# Altium PCB solid_state_overdrive_v2.PcbDoc
Units mm, origin at the board's own origin, x right, y up, seen from the top; angles counter-clockwise.
Board outline 106.68 x 50.55 mm, 2 copper layers (Top Layer, Bottom Layer); 51 components, 28 nets, 118 pads, 0 vias.
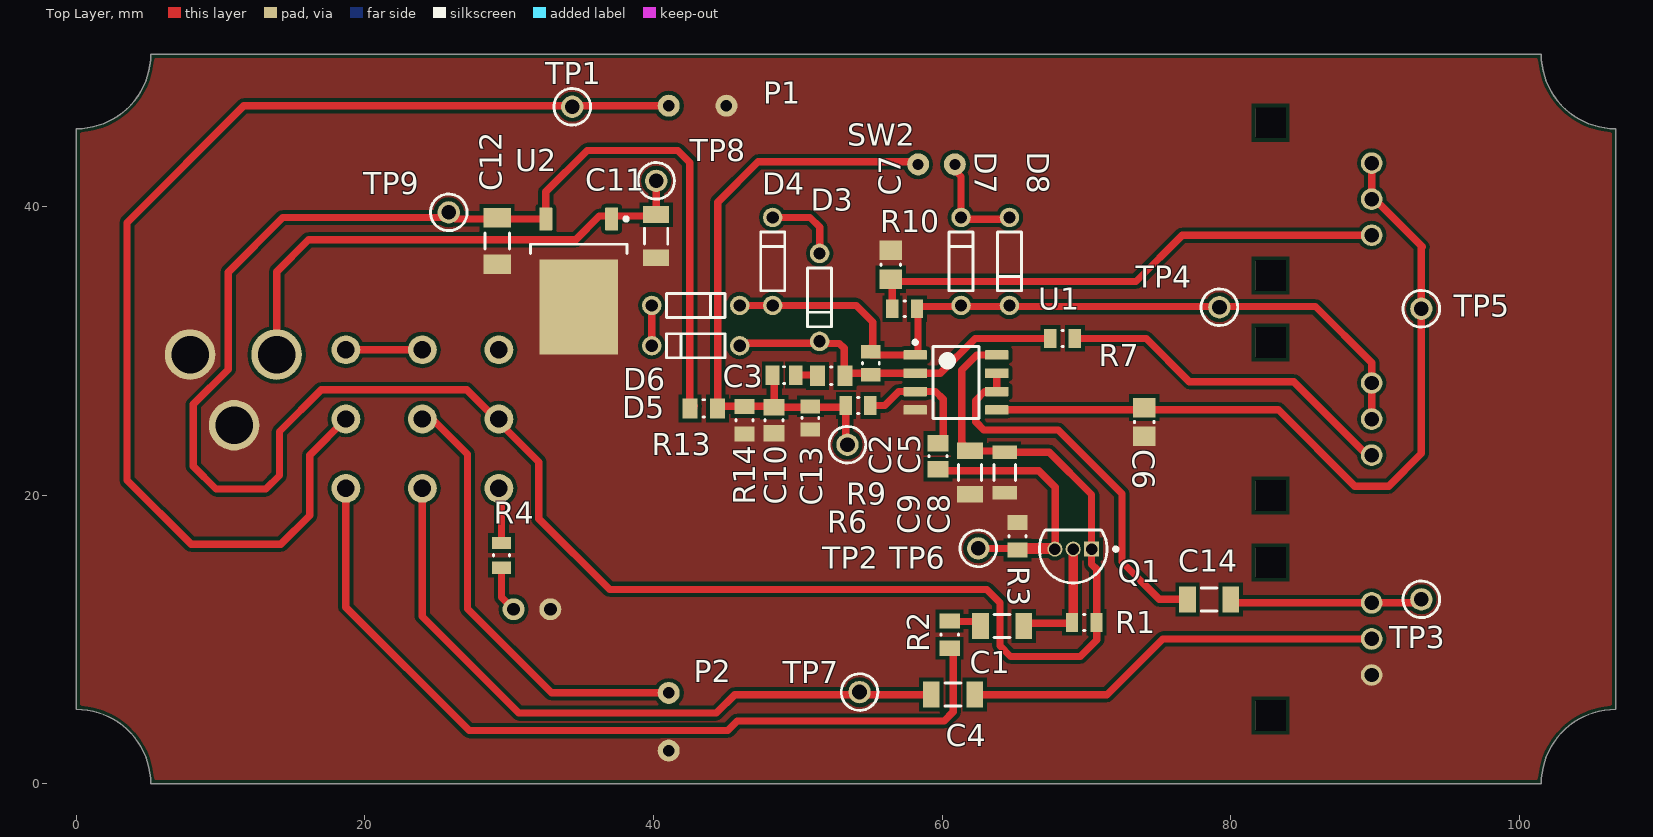
[diagram p0: Top Layer view]
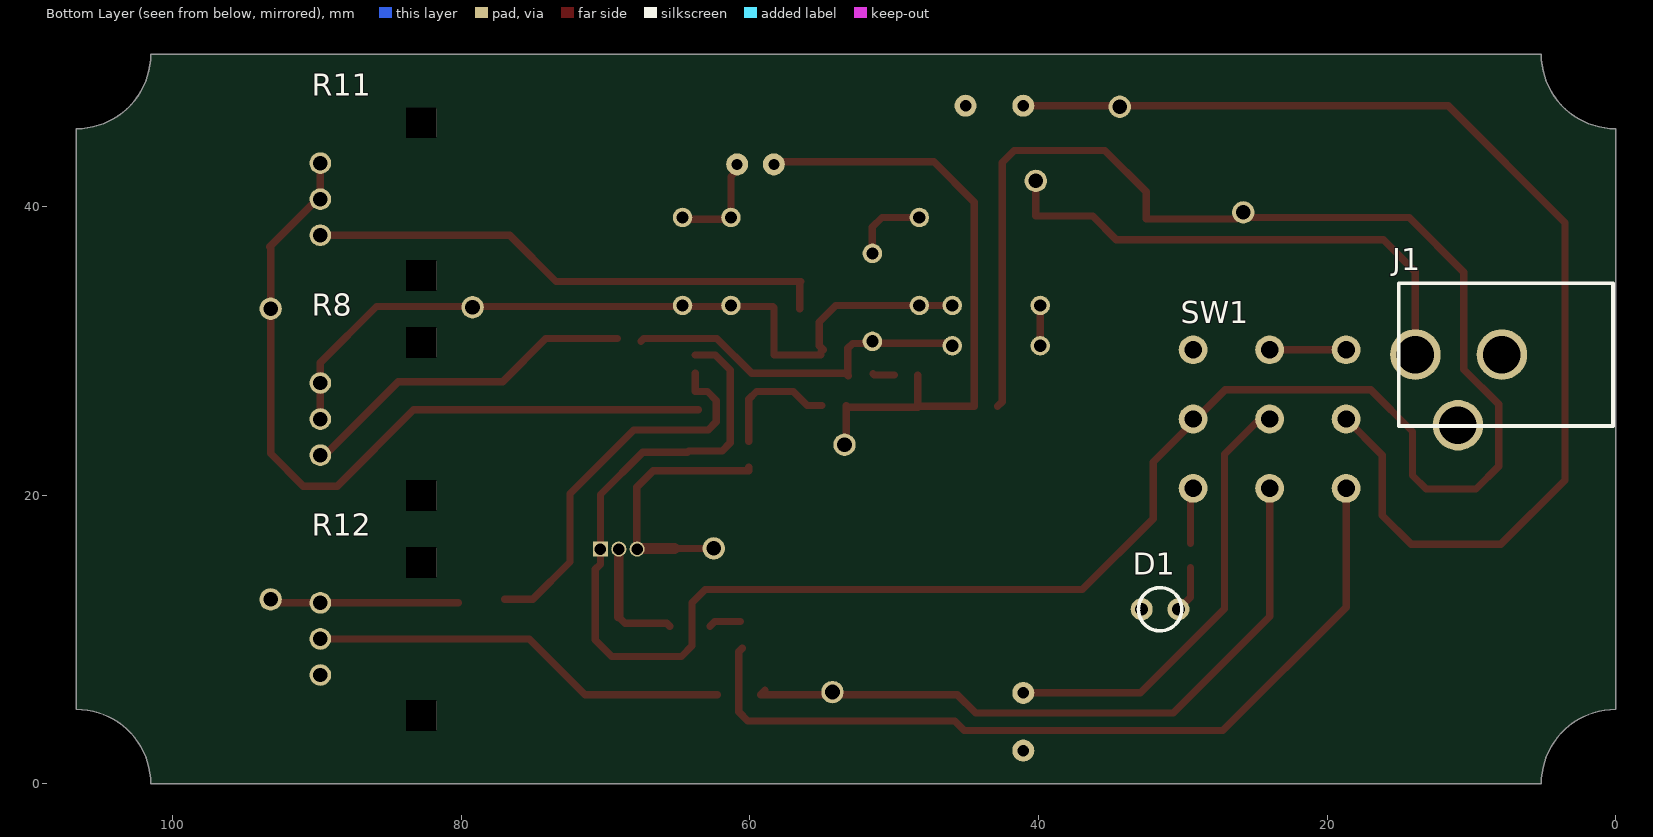
[diagram p1: Bottom Layer view, seen from below]

## Layer stack, top to bottom
Top Solder: solder mask 0.0102, Solder Resist, Dk 3.5
Top Layer: signal copper 0.0356
Dielectric 1: dielectric 0.32, FR-4, Dk 4.8
Bottom Layer: signal copper 0.0356
Bottom Solder: solder mask 0.0102, Solder Resist, Dk 3.5

## Board outline
5.15,0 ccw(c0,0) 0,5.15 0,45.396 ccw(c0,50.546) 5.15,50.546 101.53,50.546 ccw(c106.68,50.546) 106.68,45.396 106.68,5.15 ccw(c106.68,0) 101.53,0

## Design rules (kind name [scope] priority, off if disabled: settings)
BoardOutlineClearance [All] p1: gap=0.254
Clearance [All] p1: gap=0.381 except(0.254: Arc-Poly Track-Poly SMDPad-Poly THPad-Poly Via-Poly Fill-Poly)
PolygonConnect [All] p1: connectstyle=Direct reliefconductorwidth=0.254 reliefentries=4 polygonreliefangle="90 Angle" airgapwidth=0.254
RoutingVias [All] p1: holewidth=0.711 width=1.27 viastyle="Through Hole" minholewidth=0.711 minwidth=1.27 maxholewidth=0.711 maxwidth=1.27
SolderMaskExpansion [All] p1: expansion=0.102
Width [All] p1: maxlimit=1.27 minlimit=0.254 preferedwidth=0.508 bottomlayer_maxwidth=0.254 bottomlayer_prefwidth=0.254 minimp=50.000000 maximp=50.000000 favimp=50.000000
30 further rules are at their usual default settings.

## Components (designator, comment, footprint, x,y, rotation, side; value= is the part's Value field where it differs from the comment)
C1 "CAP 10nF 25V 1206(3216)" CAPC1206(3216)170_N 64.16,10.922 r0 top
C2 "CAP 10nF 25V 0805(2012)" CAPC0805(2012)75_L 55.067,29.134 r90 top
C3 "CAP 1uF 50V 0805(2012)" CAPC0805(2012)145_L 49.047,28.321 r180 top
C4 "CAP 10nF 25V 1206(3216)" CAPC1206(3216)170_N 60.757,6.172 r180 top
C5 "CAP 100nF 50V 0805(2012)" CAPC0805(2012)145_N 59.715,22.708 r90 top
C6 "CAP 1nF 50V 0805(2012)" CAPC0805(2012)75_M 74.016,25.07 r270 top
C7 "CAP 1nF 50V 0805(2012)" CAPC0805(2012)75_M 56.439,35.966 r90 top
C8 "CAP 100nF 25V 1206(3216)" CAPC1206(3216)190_L 64.338,21.565 r90 top
C9 "CAP 4.7nF 25V 1206(3216)" CAPC1206(3216)100_N 61.925,21.565 r90 top
C10 "CAP 100nF 50V 0805(2012)" CAPC0805(2012)145_N 48.362,25.197 r90 top
C11 "CAP 330nF 16V 1206(3216)" CAPC1206(3216)110_N 40.183,37.948 r90 top
C12 "CAP 22uF 16V 1206(3216)" CAPC1206(3216)190_M 29.159,37.617 r90 top
C13 "CAP 4.7nF 50V 0805(2012)" CAPC0805(2012)110_L 50.876,25.349 r90 top
C14 "CAP 10nF 25V 1206(3216)" CAPC1206(3216)170_N 78.511,12.776 r0 top
D1 "5mm_LED" 3mm_diode 30.302,12.09 r0 bottom
D3 "JANTX1N4148-1" MCSM-DO-35-2 51.511,33.706 r270 top
D4 "JANTX1N4148-1" MCSM-DO-35-2 48.26,36.195 r90 top
D5 "JANTX1N4148-1" MCSM-DO-35-2 42.926,30.353 r180 top
D6 "JANTX1N4148-1" MCSM-DO-35-2 42.926,33.147 r0 top
D7 "JANTX1N4148-1" MCSM-DO-35-2 61.316,36.195 r90 top
D8 "JANTX1N4148-1" MCSM-DO-35-2 64.668,36.195 r270 top
J1 "DC JACK, 2.1mm ID" 163-179PH-EX 0.174,29.743 r0 bottom
P1 "JACK_MONO_6.35mm" MONO_JUMPER 43.053,46.99 r0 top
P2 "JACK_MONO_6.35mm" MONO_JUMPER 41.053,4.293 r270 top
Q1 "BC547B" ONSC-TO-92-3-29-11 69.088,16.256 r180 top
R1 "100K 5% 0805(2012)" RESC0805(2012)_L 69.85,11.176 r0 top
R2 "1K 5% 0805(2012)" RESC0805(2012)_N 60.528,10.338 r270 top
R3 "1K 5% 0805(2012)" RESC0805(2012)_N 65.227,17.145 r270 top
R4 "510R 5% 0805(2012)" RESC0805(2012)_L 29.464,15.824 r270 top
R6 "1K 5% 0805(2012)" RESC0805(2012)_N 52.324,28.271 r180 top
R7 "10K 5% 0805(2012)" RESC0805(2012)_L 68.351,30.861 r180 top
R8 "ALPHA-POT" ALPHA_POT 89.774,25.273 r270 bottom
R9 "100K 5% 0805(2012)" RESC0805(2012)_L 54.178,26.213 r180 top
R10 "510R 5% 0805(2012)" RESC0805(2012)_L 57.404,32.918 r0 top
R11 "ALPHA-POT" ALPHA_POT 89.774,40.513 r270 bottom
R12 "ALPHA-POT" ALPHA_POT 89.774,10.033 r270 bottom
R13 "1K 5% 0805(2012)" RESC0805(2012)_N 43.485,26.01 r0 top
R14 "1K 5% 0805(2012)" RESC0805(2012)_N 46.304,25.197 r270 top
SW1 "3PDT SW" 3PDT 23.978,25.273 r180 bottom
SW2 "SPST Toggle Switch" TOGGLE_SW_JUMPER 59.614,42.926 r0 top
TP1 "5001" KSTN-5001 34.366,46.914 r0 top
TP2 "5001" KSTN-5001 53.442,23.495 r0 top
TP3 "5001" KSTN-5001 93.218,12.776 r0 top
TP4 "5001" KSTN-5001 79.223,33.02 r0 top
TP5 "5001" KSTN-5001 93.218,32.918 r0 top
TP6 "5001" KSTN-5001 62.509,16.307 r0 top
TP7 "5001" KSTN-5001 54.28,6.35 r0 top
TP8 "5001" KSTN-5001 40.183,41.783 r0 top
TP9 "5001" KSTN-5001 25.806,39.599 r0 top
U1 "TL072ACD" D0008A_M 60.96,27.813 r0 top
U2 "BA90BC0FP" BA90BC0FP-E2 34.817,34.841 r270 top

## Footprints (in the part's own frame and the unit in brackets; to place one, negate y for a bottom-side part, rotate by r counter-clockwise, add the part's x,y. Pads: shape width x height; smd on the part's side, far side on the other; paste and mask are expansions set on the pad)
3mm_diode [mil]
  round 60 hole 35.43: 1(0,0) 2(100,0)
  silkscreen extent -9,-59 109,59
3PDT [mm] "FS57003PLT2B2M1QEH"
  round 2 hole 1.2: 1(-5.3,-4.8) 2(-5.3,0) 3(-5.3,4.8) 4(0,-4.8) 5(0,0) 6(0,4.8) 7(5.3,-4.8) 8(5.3,0) 9(5.3,4.8)
163-179PH-EX [mm] "2.1mm ID barrel jack"
  round 3.5 hole 2.6: 1(13.7,0) 2(10.75,4.9) 3(7.7,0)
  silkscreen extent 0,-4.95 14.86,4.95
ALPHA_POT [mm]
  round 1.5 hole 1: 1(-2.5,0) 2(0,0) 3(2.5,0)
  rect 2x2.1 hole 2.1 square: 4(-5.3,7) 4(5.3,7)
BA90BC0FP-E2 [mm] "D-PAK, 4-Leads, Body 6.1x6.6mm, Pitch 2.29mm, Lead Span 9.7mm, IPC High Density"
  rrect11% 1.6x0.9 smd: 1(-4.3,2.28) 3(-4.3,-2.28)
  rrect2% 6.6x5.45 smd: 4(1.8,0)
  silkscreen extent -4.42,-3.35 -1.9,3.4, body extent -2.55,-3.35 3.65,3.35, height 2.38
CAPC0805(2012)75_L [mm] "Chip Capacitor, Body 2.0x1.2mm, Height 0.75mm, IPC High Density"
  rect 0.95x1.35 smd: 1(-0.8,0) 2(0.8,0)
  silkscreen extent -0.05,-0.58 0.05,0.58, body extent -1.1,-0.72 1.1,0.72, height 0.75
CAPC0805(2012)75_M [mm] "Chip Capacitor, Body 2.0x1.2mm, Height 0.75mm, IPC Low Density"
  rect 1.35x1.55 smd: 1(-1,0) 2(1,0)
  silkscreen extent -0.05,-0.67 0.05,0.67, body extent -1.1,-0.72 1.1,0.72, height 0.75
CAPC0805(2012)110_L [mm] "Chip Capacitor, Body 2.0x1.2mm, Height 1.1mm, IPC High Density"
  rect 0.95x1.35 smd: 1(-0.8,0) 2(0.8,0)
  silkscreen extent -0.05,-0.58 0.05,0.58, body extent -1.1,-0.72 1.1,0.72, height 1.1
CAPC0805(2012)145_L [mm] "Chip Capacitor, Body 2.0x1.2mm, Height 1.45mm, IPC High Density"
  rect 0.95x1.35 smd: 1(-0.8,0) 2(0.8,0)
  silkscreen extent -0.05,-0.58 0.05,0.58, body extent -1.1,-0.72 1.1,0.72, height 1.45
CAPC0805(2012)145_N [mm] "Chip Capacitor, Body 2.0x1.2mm, Height 1.45mm, IPC Medium Density"
  rect 1.15x1.45 smd: 1(-0.9,0) 2(0.9,0)
  silkscreen extent -0.05,-0.62 0.05,0.63, body extent -1.1,-0.72 1.1,0.73, height 1.45
CAPC1206(3216)100_N [mm] "Chip Capacitor, Body 3.2x1.6mm, Height 1mm, IPC Medium Density"
  rect 1.15x1.8 smd: 1(-1.5,0) 2(1.5,0)
  silkscreen extent -0.55,-0.8 0.55,0.8, body extent -1.7,-0.9 1.7,0.9, height 1
CAPC1206(3216)110_N [mm] "Chip Capacitor, Body 3.2x1.6mm, Height 1.1mm, IPC Medium Density"
  rect 1.15x1.8 smd: 1(-1.5,0) 2(1.5,0)
  silkscreen extent -0.55,-0.8 0.55,0.8, body extent -1.7,-0.9 1.7,0.9, height 1.1
CAPC1206(3216)170_N [mm] "Chip Capacitor, Body 3.2x1.6mm, Height 1.7mm, IPC Medium Density"
  rect 1.15x1.8 smd: 1(-1.5,0) 2(1.5,0)
  silkscreen extent -0.55,-0.8 0.55,0.8, body extent -1.7,-0.9 1.7,0.9, height 1.7
CAPC1206(3216)190_L [mm] "Chip Capacitor, Body 3.2x1.6mm, Height 1.9mm, IPC High Density"
  rect 0.95x1.7 smd: 1(-1.4,0) 2(1.4,0)
  silkscreen extent -0.55,-0.75 0.55,0.75, body extent -1.7,-0.9 1.7,0.9, height 1.9
CAPC1206(3216)190_M [mm] "Chip Capacitor, Body 3.2x1.6mm, Height 1.9mm, IPC Low Density"
  rect 1.35x1.9 smd: 1(-1.6,0) 2(1.6,0)
  silkscreen extent -0.55,-0.85 0.55,0.85, body extent -1.7,-0.9 1.7,0.9, height 1.9
D0008A_M [mm] "SOIC, 8-Leads, Body 5x4mm, Pitch 1.27mm, IPC Low Density"
  rrect15% 1.65x0.65 smd: 1(-2.825,1.905) 2(-2.825,0.635) 3(-2.825,-0.635) 4(-2.825,-1.905) 5(2.825,-1.905) 6(2.825,-0.635) 7(2.825,0.635) 8(2.825,1.905)
  silkscreen extent -2.95,-2.5 1.6,2.9, body extent -3,-2.45 3,2.45, height 1.63
KSTN-5001 [mm] "Test Point, Through Hole, Dia 2.54mm"
  round 1.55 hole 1.016: 1(0,0)
  silkscreen extent -1.27,-1.27 1.27,1.27, body extent -1.25,-1.25 1.25,1.25, height 4.62
MCSM-DO-35-2 [mm] "TH, 2-Leads, Dia 1.665mm, Body 4.065x1.665mm"
  round 1.35 hole 0.85: 1(-3.049,0) 2(3.049,0)
  silkscreen extent -2.03,-0.83 2.03,0.83, body extent -3.33,-0.83 3.33,0.83, height 1.67
MONO_JUMPER [mm]
  round 1.524 hole 0.8: 1(-2,0) 2(2,0)
ONSC-TO-92-3-29-11 [mm] "TO, 3-Leads, Body Dia 4.7mm, Pitch 1.27mm"
  rect 1.05x1.05 hole 0.8: 1(-1.27,0)
  round 1.05 hole 0.8: 2(0,0) 3(1.27,0)
  silkscreen extent -3.08,-1.34 2.35,2.35, body extent -2.35,-1.33 2.36,2.36, height 7.87
RESC0805(2012)_L [mm] "Chip Resistor, Body 2.0x1.3mm, IPC High Density"
  rect 0.85x1.3 smd: 1(-0.85,0) 2(0.85,0)
  silkscreen extent -0.05,-0.55 0.05,0.55, body extent -1.1,-0.67 1.1,0.68, height 0.7
RESC0805(2012)_N [mm] "Chip Resistor, Body 2.0x1.3mm, IPC Medium Density"
  rect 1.05x1.4 smd: 1(-0.95,0) 2(0.95,0)
  silkscreen extent -0.05,-0.6 0.05,0.6, body extent -1.1,-0.67 1.1,0.68, height 0.7
TOGGLE_SW_JUMPER [mil]
  round 60 hole 30: 1(-50,0) 2(50,0)

## Part data
C1 C4 C14: library part CMP-1037-03495-1, "CAP 10nF 25V ±20% 1206 (3216 Metric) Thickness 1.7mm SMD"
C2: library part CMP-1036-03833-1, "CAP 10nF 25V ±20% 0805 (2012 Metric) Thickness 0.75mm SMD"
C3: library part CMP-1036-04761-1, "CAP 1uF 50V ±10% 0805 (2012 Metric) Thickness 1.45mm SMD"
C5 C10: library part CMP-1036-04417-1, "CAP 100nF 50V ±5% 0805 (2012 Metric) Thickness 1.45mm SMD"
C6 C7: library part CMP-1036-02981-1, "CAP 1nF 50V ±20% 0805 (2012 Metric) Thickness 0.75mm SMD"
C8: library part CMP-1037-04186-1, "CAP 100nF 25V ±1% 1206 (3216 Metric) Thickness 1.9mm SMD"
C9: library part CMP-1037-03099-1, "CAP 4.7nF 25V ±1% 1206 (3216 Metric) Thickness 1mm SMD"
C11: library part CMP-1037-04467-1, "CAP 330nF 16V ±20% 1206 (3216 Metric) Thickness 1.05mm SMD"
C12: library part CMP-1037-04993-1, "CAP 22uF 16V ±20% 1206 (3216 Metric) Thickness 1.9mm SMD"
C13: library part CMP-1036-03585-1, "CAP 4.7nF 50V ±1% 0805 (2012 Metric) Thickness 1.1mm SMD"
D3 D4 D5 D6 D7 D8: library part CMP-2000-06494-1, "Glass Axial Switching Diode, 200 mA, 100 V, 2-Pin DO-35, RoHS, Bulk"
J1: "DC BARREL JACK, 2.1mm ID"
Q1: library part CMP-1048-01467-1, "Amplifier Transistor, NPN Silicon, 3-Pin TO-92, Bulk Box"
R1 R9: library part CMP-1013-00122-1, "100K 0.125W 5% 0805 (2012 Metric)  SMD"
R2 R3 R6 R13 R14: library part CMP-1013-00074-1, "1K 0.125W 5% 0805 (2012 Metric)  SMD"
R4 R10: library part CMP-1013-00067-1, "510R 0.125W 5% 0805 (2012 Metric)  SMD"
R7: library part CMP-1013-00098-1, "10K 0.125W 5% 0805 (2012 Metric)  SMD"
TP1 TP2 TP3 TP4 TP5 TP6 TP7 TP8 TP9: library part CMP-2000-05181-1, "Test Point, Black, 1-Pin THD, RoHS, Bulk"
U1: library part CMP-0015-00092-2, "Low-Noise JFET-Input Operational Amplifier, 7 to 36 V, 0 to 70 degC, 8-pin SOIC (D8), Green (RoHS & no Sb/Br)"
U2: "LDO Voltage Regulators REG 1A 9V"

## Nets (pads, with @x,y where several pads share a name; then routed paths per layer and width w, separated by ;. In a path a pad name is that pad's centre, name@x,y a point inside that pad or via, vN(x,y) a via of type N, cw(c..) or ccw(c..) an arc to the next point about the centre after c; other vN are vias at no path point)
4.5V: C3.2 C10.2 C13.2 R9.2 R13.2 R14.1 SW2.1 TP2.1 | length 43.1
  Top Layer w0.508: C10.2@48.362,26.071 48.374,26.084 C10.2@48.374,26.097 ; C10.2 C10.2@48.374,26.097 ; C3.2@48.374,28.321 C10.2@48.374,26.171 ; TP2.1 53.328,23.608 R9.2 53.212,26.097 C10.2@48.374,26.097 ; SW2.1@58.344,43.104 47.244,43.104 44.45,40.31 44.45,26.171 C10.2@48.374,26.171 ; C10.2@48.374,26.097 C10.2@48.374,26.171
9V: C8.2 C9.2 C12.2 Q1.1 R1.2 R13.1 SW1.2 TP9.1 U1.8 U2.3 | length 177.5
  Top Layer w0.508: R13.1@42.838,26.162 42.52,26.48 42.52,43.053 41.681,43.891 35.408,43.891 32.537,41.021 U2.3 26.264,39.141 TP9.1 25.451,39.243 14.3,39.243 10.516,35.458 10.516,28.702 8.103,26.289 8.103,21.996 9.677,20.422 13.132,20.422 14.072,21.361 14.072,24.409 16.967,27.305 27.051,27.305 32.055,22.301 32.055,18.364 36.957,13.462 63.094,13.462 64.008,12.548 64.008,9.55 64.745,8.814 69.571,8.814 70.714,9.957 70.714,14.859 70.358,15.215 Q1.1 70.358,20.041 67.434,22.965 C8.2 64.238,23.065 C9.2 61.366,23.623 61.366,28.677 62.408,29.718 U1.8
12V_IN: C11.2 J1.1 TP8.1 U2.1 | length 36.1
  Top Layer w0.508: J1.1 13.874,35.489 16.091,37.706 34.608,37.706 36.249,39.348 40.183,39.348 TP8.1
AUDIO_IN: SW1.8 TP1.1 | length 81.8
  Top Layer w0.508: SW1.8 16.18,22.775 16.18,18.593 14.173,16.586 7.95,16.586 3.505,21.031 3.505,38.887 11.608,46.99 41.053,46.99
AUDIO_OUT: P2.1 SW1.5 | length 31.2
  Top Layer w0.508: SW1.5 24.663,25.273 27.102,22.835 27.102,12.116 32.925,6.293 P2.1
BYPASS: SW1.6 SW1.9 | length 5.3
  Top Layer w0.508: SW1.9 SW1.6
CC_OUT: C5.1 Q1.3 R3.2 TP6.1 | length 17.9
  Top Layer w0.508: C5.1@60.071,21.935 60.071,21.692 66.7,21.692 67.843,20.549 67.843,16.535 Q1.3@67.603,16.295 ; TP6.1 65.215,16.307 R3.2@65.227,16.295
  Top Layer w0.762: R3.2@65.227,16.295 Q1.3@67.603,16.295
DRIVE_OUT: C2.2 D4.1 D6.2 D7.1 D8.2 R8.1 R8.2 R10.2 TP4.1 U1.1 | length 55.5
  Top Layer w0.508: D6.2 D4.1 ; D4.1 54.052,33.146 55.194,32.004 55.194,30.353 C2.2@54.915,30.074 ; C2.2 55.067,29.718 U1.1 58.335,29.718 58.335,32.999 58.406,33.071 85.877,33.071 89.774,29.174 R8.1 R8.2
EFFECT_OUT: C4.2 SW1.4 TP7.1 | length 47.9
  Top Layer w0.508: SW1.4 23.978,11.582 30.664,4.896 44.342,4.896 45.618,6.172 C4.2 C4.2@58.952,6.477
GND: C6.2 C7.2 C8.1 C9.1 C10.1 C11.1 C12.1 C13.1 D1.2 J1.2 J1.3 P1.2 P2.2 R3.1 R12.3 R14.2 U1.4 U2.4
NetC1_1: C1.1 R2.1 | length 2.2
  Top Layer w0.508: R2.1@60.655,11.24 62.442,11.24 C1.1@62.76,10.922
NetC1_2: C1.2 Q1.2 R1.1 | length 8.5
  Top Layer w0.508: C1.2@65.56,10.922 65.764,11.125 68.656,11.125 R1.1@69.088,11.557
  Top Layer w0.635: R1.1@69.088,11.557 Q1.2
NetC2_1: C2.1 D3.2 D5.1 R6.1 R7.2 U1.2 | length 24.9
  Top Layer w0.508: D5.1 46.153,30.531 51.385,30.531 D3.2 51.663,30.505 52.883,30.505 53.213,30.175 R6.1@53.213,28.448 ; R6.1@53.174,28.271 53.213,28.31 R6.1@53.213,28.448 ; R7.2@67.552,30.658 67.349,30.861 62.294,30.861 59.881,28.448 U1.2 55.079,28.448 R6.1@53.213,28.448
NetC3_1: C3.1 R6.2 | length 1.5
  Top Layer w0.508: C3.1@49.974,28.321 51.372,28.321 R6.2@51.474,28.423
NetC4_1: C4.1 R12.2 | length 29.1
  Top Layer w0.508: C4.1 71.425,6.172 75.286,10.033 R12.2
NetC5_2: C5.2 R9.1 U1.3 | length 8.6
  Top Layer w0.508: R9.1 56.032,26.213 56.998,27.178 U1.3 59.538,27.178 60.071,26.645 C5.2@60.071,23.735
NetC6_1: C6.1 R11.1 R11.2 TP5.1 U1.5 | length 54.5
  Top Layer w0.508: U1.5@63.585,25.908 U1.5 83.312,25.908 88.595,20.625 90.957,20.625 93.218,22.885 TP5.1 93.218,37.16 93.269,37.211 R11.2@89.774,40.706 ; R11.2 R11.2@89.774,40.706 ; R11.1 R11.2@89.774,40.706
NetC7_1: C7.1 R10.1 R11.3 | length 36.6
  Top Layer w0.508: R10.1 56.554,34.721 56.464,34.811 73.444,34.811 76.646,38.013 R11.3
NetC14_1: C14.1 U1.6 U1.7 | length 27
  Top Layer w0.508: U1.7 U1.6 62.941,27.178 62.325,26.562 62.325,25.076 62.89,24.511 68.047,24.511 72.466,20.091 72.466,15.367 75.057,12.776 C14.1
NetC14_2: C14.2 R12.1 TP3.1 | length 13
  Top Layer w0.508: C14.2@80.215,12.548 TP3.1@93.218,12.548
NetD1_1: D1.1 R4.2 | length 3.2
  Top Layer w0.508: R4.2 29.464,12.929 D1.1
NetD3_1: D3.1 D4.2 | length 5.4
  Top Layer w0.508: D4.2 50.85,39.244 51.511,38.583 D3.1
NetD5_2: D5.2 D6.1 | length 2.5
  Top Layer w0.508: D5.2@39.877,30.608 D6.1
NetD7_2: D7.2 D8.1 SW2.2 | length 7.5
  Top Layer w0.508: SW2.2 60.884,42.52 61.316,42.088 D7.2 ; D7.2@61.316,39.116 64.034,39.116 64.009,39.141 D8.1@64.922,39.141
NetP1_1: P1.1
NetR2_2: R2.2 SW1.7 | length 58.9
  Top Layer w0.508: SW1.7 18.678,12.234 27.229,3.683 40.468,3.683 40.474,3.69 45.142,3.69 45.796,4.343 60.147,4.343 60.782,4.978 60.782,9.134 R2.2
NetR4_1: R4.1 SW1.1 | length 3.9
  Top Layer w0.508: SW1.1 29.464,20.287 R4.1
NetR7_1: R7.1 R8.3 | length 23.9
  Top Layer w0.508: R7.1 74.143,30.861 77.14,27.864 84.379,27.864 89.47,22.773 R8.3
pads on no net: R8.4 R11.4 R12.4 SW1.3

## Polygon pours and split planes (outlines as drawn)
GND on Top Layer "GND" (solid, remove dead copper, pour order 0): -1.293,52.248 108.255,52.248 108.255,-1.448 -1.067,-1.448

## Other copper
Top Layer:
  pour cut-out: 57.48,27.076 59.741,27.076 59.741,26.441 60.909,26.441 60.909,28.6 57.48,28.6

## Silkscreen, mask and mechanical layers (free items; w line width, h text height)
Mechanical 1:
  the board outline again, w0.254